# Altium PCB WS2812B_Bar.PcbDoc
Units mil, origin at the board's own origin, x right, y up, seen from the top; angles counter-clockwise.
Board outline 2559.06 x 511.81 mil, 2 copper layers (Top Layer, Bottom Layer); 32 components, 13 nets, 80 pads, 19 vias.
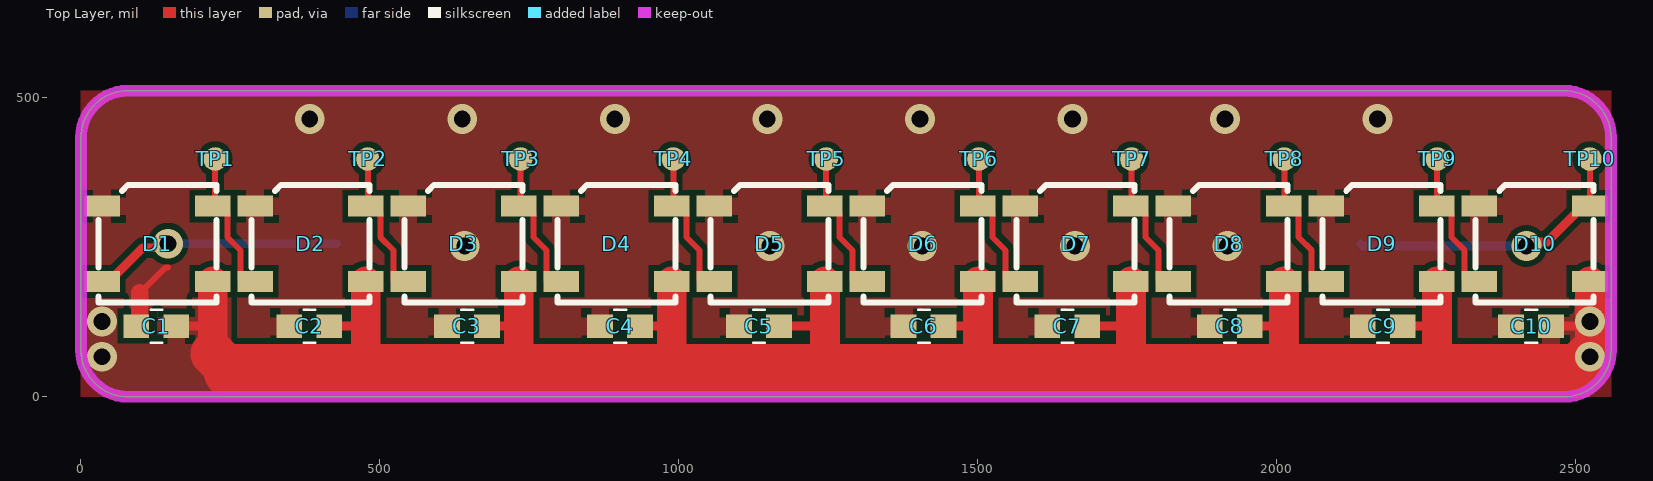
[diagram p0: Top Layer view]
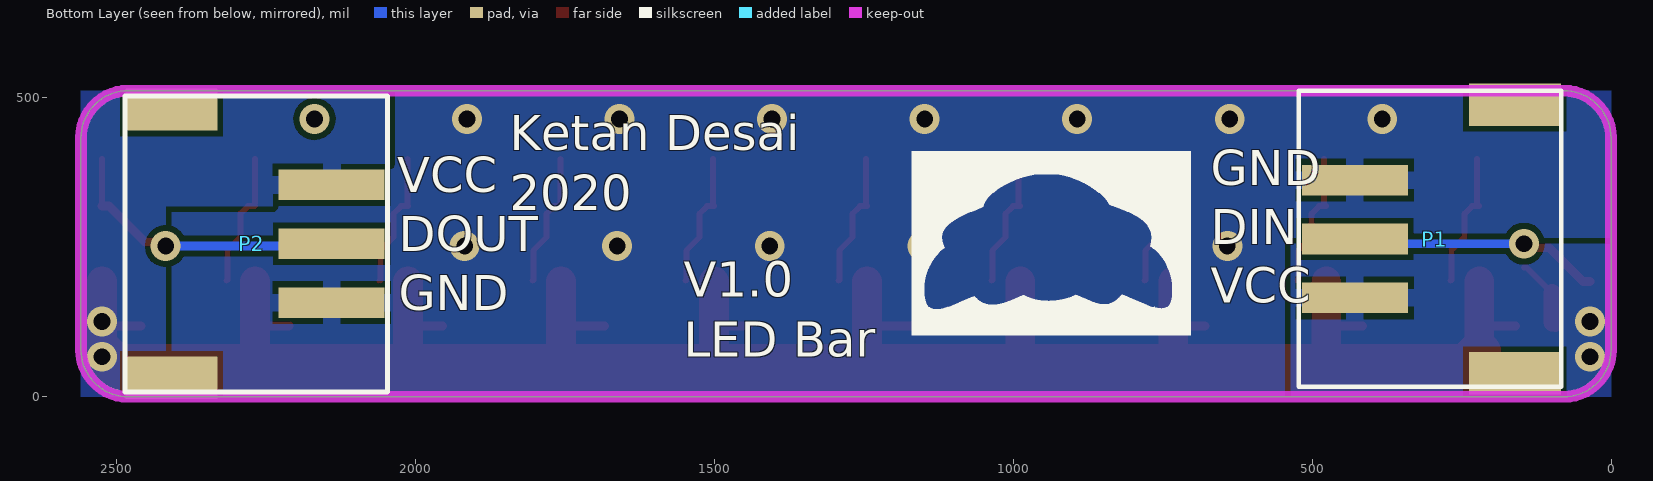
[diagram p1: Bottom Layer view, seen from below]
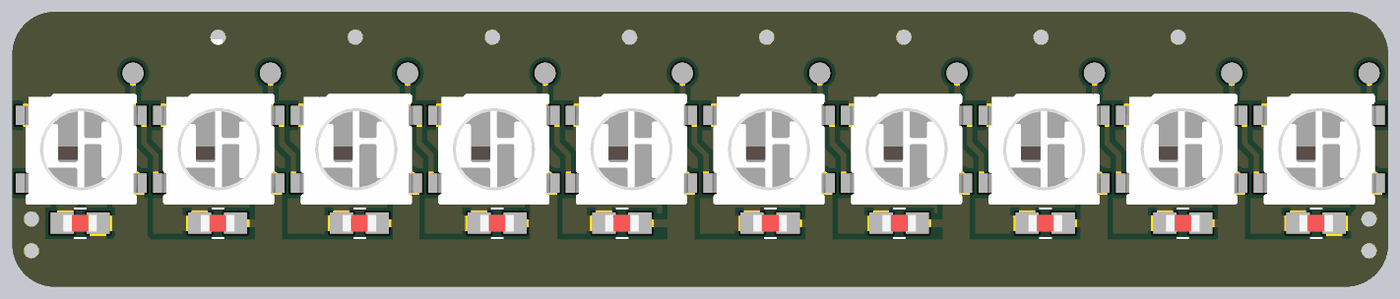
[diagram p2: 3D render of the assembled board from above, using the file's embedded part models]

## Layer stack, top to bottom
Top Solder: solder mask 0.4, Solder Resist, Dk 3.5
Top Layer: signal copper 1.4
Dielectric 1: dielectric 12.6, FR-4, Dk 4.8
Bottom Layer: signal copper 1.4
Bottom Solder: solder mask 0.4, Solder Resist, Dk 3.5

## Board outline
2559.06,433.07 ccw(c2480.32,433.07) 2480.32,511.81 78.74,511.81 ccw(c78.74,433.07) 0,433.07 0,78.74 ccw(c78.74,78.74) 78.74,0 2480.32,0 ccw(c2480.32,78.74) 2559.06,78.74

## Design rules (kind name [scope] priority, off if disabled: settings)
Clearance [All] p1: gap=10 ignorepadtopadclearanceinfootprint=FALSE except(0: Arc-Hole Track-Hole SMDPad-Hole THPad-Hole Via-Hole Fill-Hole Poly-Hole Region-Hole Text-Hole)
PolygonConnect PolygonConnect_4 [All vs IsNamedPolygon('NONET_L-01_P-001')] p1: thpad.connectstyle=Relief thpad.reliefconductorwidth=10 thpad.reliefentries=4 thpad.polygonreliefangle="90 Angle" thpad.airgapwidth=10 smdpad.connectstyle=Relief smdpad.reliefconductorwidth=30 smdpad.reliefentries=4 smdpad.polygonreliefangle="90 Angle" smdpad.airgapwidth=10 via.connectstyle=Direct via.reliefconductorwidth=10 via.reliefentries=4 via.polygonreliefangle="90 Angle" via.airgapwidth=10
PolygonConnect PolygonConnect_3 [All vs IsNamedPolygon('NONET_L-01_P-001')] p2: thpad.connectstyle=Relief thpad.reliefconductorwidth=10 thpad.reliefentries=4 thpad.polygonreliefangle="90 Angle" thpad.airgapwidth=10 smdpad.connectstyle=Relief smdpad.reliefconductorwidth=25 smdpad.reliefentries=4 smdpad.polygonreliefangle="90 Angle" smdpad.airgapwidth=10 via.connectstyle=Direct via.reliefconductorwidth=10 via.reliefentries=4 via.polygonreliefangle="90 Angle" via.airgapwidth=10
PolygonConnect PolygonConnect_2 [All vs IsNamedPolygon('NONET_L-01_P-001')] p3: thpad.connectstyle=Relief thpad.reliefconductorwidth=10 thpad.reliefentries=4 thpad.polygonreliefangle="90 Angle" thpad.airgapwidth=10 smdpad.connectstyle=Relief smdpad.reliefconductorwidth=10 smdpad.reliefentries=4 smdpad.polygonreliefangle="90 Angle" smdpad.airgapwidth=10 via.connectstyle=Direct via.reliefconductorwidth=10 via.reliefentries=4 via.polygonreliefangle="90 Angle" via.airgapwidth=10
PolygonConnect PolygonConnect_1 [All vs IsNamedPolygon('NONET_L-01_P-001')] p4: thpad.connectstyle=Relief thpad.reliefconductorwidth=10 thpad.reliefentries=4 thpad.polygonreliefangle="90 Angle" thpad.airgapwidth=10 smdpad.connectstyle=Relief smdpad.reliefconductorwidth=10 smdpad.reliefentries=4 smdpad.polygonreliefangle="90 Angle" smdpad.airgapwidth=10 via.connectstyle=Direct via.reliefconductorwidth=10 via.reliefentries=4 via.polygonreliefangle="90 Angle" via.airgapwidth=10
PolygonConnect [All] p5: connectstyle=Relief reliefconductorwidth=10 reliefentries=4 polygonreliefangle="90 Angle" airgapwidth=10
RoutingVias [All] p1: holewidth=28 width=50 viastyle="Through Hole" minholewidth=28 minwidth=50 maxholewidth=28 maxwidth=50
SolderMaskExpansion [All] p1: expansion=4 istentingtop=FALSE
Width [All] p1: maxlimit=90 minlimit=7 preferedwidth=10
30 further rules are at their usual default settings.

## Components (designator, comment, footprint, x,y, rotation, side; value= is the part's Value field where it differs from the comment)
C1 "C0603 100nF 25V X7R" C0603-IPC 125.98,118.11 r0 top value=100nF
C2 "C0603 100nF 25V X7R" C0603-IPC 381.89,118.11 r0 top value=100nF
C3 "C0603 100nF 25V X7R" C0603-IPC 645.67,118.11 r0 top value=100nF
C4 "C0603 100nF 25V X7R" C0603-IPC 901.57,118.11 r0 top value=100nF
C5 "C0603 100nF 25V X7R" C0603-IPC 1133.86,118.11 r0 top value=100nF
C6 "C0603 100nF 25V X7R" C0603-IPC 1409.45,118.11 r0 top value=100nF
C7 "C0603 100nF 25V X7R" C0603-IPC 1649.61,118.11 r0 top value=100nF
C8 "C0603 100nF 25V X7R" C0603-IPC 1921.26,118.11 r0 top value=100nF
C9 "C0603 100nF 25V X7R" C0603-IPC 2177.17,118.11 r0 top value=100nF
C10 "C0603 100nF 25V X7R" C0603-IPC 2425.2,118.11 r0 top value=100nF
D1 "WS2812B" WS2812B 127.95,255.91 r180 top
D2 "WS2812B" WS2812B 383.86,255.91 r180 top
D3 "WS2812B" WS2812B 639.76,255.91 r180 top
D4 "WS2812B" WS2812B 895.67,255.91 r180 top
D5 "WS2812B" WS2812B 1151.57,255.91 r180 top
D6 "WS2812B" WS2812B 1407.48,255.91 r180 top
D7 "WS2812B" WS2812B 1663.39,255.91 r180 top
D8 "WS2812B" WS2812B 1919.29,255.91 r180 top
D9 "WS2812B" WS2812B 2175.2,255.91 r180 top
D10 "WS2812B" WS2812B 2431.1,255.91 r180 top
P1 "XH-A" "XH Header 1x3 SMD 2.5MM HORIZONTAL" 294.76,263.84 r90 bottom
P2 "XH-A" "XH Header 1x3 SMD 2.5MM HORIZONTAL" 2273.62,255.91 r270 bottom
TP1 "Testpoint_SMT" TESTPOINT_SMT 255.91,366.14 r90 top
TP2 "Testpoint_SMT" TESTPOINT_SMT 511.37,366.14 r90 top
TP3 "Testpoint_SMT" TESTPOINT_SMT 766.84,366.14 r90 top
TP4 "Testpoint_SMT" TESTPOINT_SMT 1022.31,366.14 r90 top
TP5 "Testpoint_SMT" TESTPOINT_SMT 1277.78,366.14 r90 top
TP6 "Testpoint_SMT" TESTPOINT_SMT 1533.25,366.14 r90 top
TP7 "Testpoint_SMT" TESTPOINT_SMT 1788.71,366.14 r90 top
TP8 "Testpoint_SMT" TESTPOINT_SMT 2044.18,366.14 r90 top
TP9 "Testpoint_SMT" TESTPOINT_SMT 2299.65,366.14 r90 top
TP10 "Testpoint_SMT" TESTPOINT_SMT 2555.12,366.14 r90 top

## Footprints (in the part's own frame and the unit in brackets; to place one, negate y for a bottom-side part, rotate by r counter-clockwise, add the part's x,y. Pads: shape width x height; smd on the part's side, far side on the other; paste and mask are expansions set on the pad)
C0603-IPC [mm]
  rect 1.1x1 smd: 1(-0.85,0) 2(0.85,0)
  silkscreen extent -0.24,-0.7 0.26,0.7, body extent -0.8,-0.4 0.8,0.4, height 0.3
TESTPOINT_SMT [mm]
  round 1 smd: 1(0.8,0.8)
WS2812B [mm] "WS2812 Individually Addressable LED"
  rect 1.5x0.9 smd: 1(-2.35,1.6) 2(-2.35,-1.6) 3(2.35,-1.6) 4(2.35,1.6)
  silkscreen extent -2.5,-2.5 2.5,2.5, body extent -2.67,-2.48 2.68,2.47, height 1.71
"XH Header 1x3 SMD 2.5MM HORIZONTAL" [mm] "S3B-XH-A(LF)(SN)"
  rect 1.3x4.5 smd: 1(-2.5,3.4) 2(0,3.4) 3(2.5,3.4)
  rect 1.8x3.9 smd: ""(-5.7,-3.4) ""(5.7,-3.4)
  silkscreen extent -6.27,-5.37 6.3,5.77, body extent -6.25,-5.35 6.25,4.65, height 6

## Part data
C1 C2 C3 C4 C5 C6 C7 C8 C9 C10: "Chip Capacitor, 0603, 100nF, 25V, X7R", Max. Voltage=25V, Supplier Part Number 1=490-1524-1-ND, EIA Code=X7R, Supplier 1=Digi-Key
D1 D2 D3 D4 D5 D6 D7 D8 D9 D10: "Addressable Lighting - Discrete Serial Red, Green, Blue (RGB) 5.00mm L x 5.00mm WS2812B", Supplier Part Number 1=1528-1104-ND, Supplier 1=Digi-Key, Supplier 2=Mouser, Supplier 3=LCSC, Supplier Part Number 2=485-1655, Supplier Part Number 3=C114586
P1 P2: library part "JST XH 1x3", "XH Header Male Pin 0.098\"(2.50mm) 3 Wire To Board / Wire To Wire Connector", Supplier Part Number 1=455-2248-ND, LatestRevisionDate=17-Jul-2002, LatestRevisionNote="Re-released for DXP Platform.", Publisher="Altium Limited", Supplier 1=Digi-Key, Supplier 3=LCSC, Supplier Part Number 3=C144394
TP1 TP2 TP3 TP4 TP5 TP6 TP7 TP8 TP9 TP10: "SMT Test Point"

## Via types
v1: diameter 50, hole 28, Top Layer to Bottom Layer, tented both sides, 19 vias

## Nets (pads, with @x,y where several pads share a name; then routed paths per layer and width w, separated by ;. In a path a pad name is that pad's centre, name@x,y a point inside that pad or via, vN(x,y) a via of type N, cw(c..) or ccw(c..) an arc to the next point about the centre after c; other vN are vias at no path point)
GND: C1.1 C2.1 C3.1 C4.1 C5.1 C6.1 C7.1 C8.1 C9.1 C10.1 D1.3 D2.3 D3.3 D4.3 D5.3 D6.3 D7.3 D8.3 D9.3 D10.3 P1.3 P2.3 | length 122.5
  Top Layer w10: 98.43,173.23 141.1,215.91 145.67,215.91
  Top Layer w20: C1.1 C1.1@98.43,124.02
  Top Layer w30: C1.1@98.43,124.02 98.43,173.23
  other v1: 641.73,251.97 1151.97,251.97 1407.09,251.97 1662.2,251.97 1917.32,251.97 382.68,464.57 637.8,464.57 892.91,464.57 1148.03,464.57 1403.15,464.57 1658.27,464.57 1913.39,464.57 2168.5,464.57
NetD1_2: D1.2 D2.4 TP1.1 | length 231.9
  Top Layer w10: TP1.1 224.41,322.83 D1.2 232.28,318.9 245,306.18 245,266.81 266.81,245 266.81,195.49 D2.4@268.23,194.07
NetD1_4: D1.4 P1.2 | length 419.3
  Top Layer w15: D1.4 47.24,192.91 103.54,249.21 138.97,249.21 v1(145.67,255.91)
  Bottom Layer w15: v1(145.67,255.91) P1.2@428.62,255.91
NetD2_2: D2.2 D3.4 TP2.1 | length 226.3
  Top Layer w10: D2.2 488.19,318.9 500.91,306.18 500.91,266.81 522.72,245 522.72,195.49 D3.4@524.13,194.07 ; D2.2@479.88,322.83 TP2.1
NetD3_2: D3.2 D4.4 TP3.1 | length 226.3
  Top Layer w10: D3.2 744.09,318.9 756.81,306.18 756.81,266.81 778.62,245 778.62,195.49 D4.4@780.04,194.07 ; D3.2@735.35,322.83 TP3.1
NetD4_2: D4.2 D5.4 TP4.1 | length 226.3
  Top Layer w10: D4.2 1000,318.9 1012.72,306.18 1012.72,266.81 1034.53,245 1034.53,195.49 D5.4@1035.94,194.07 ; D4.2@990.81,322.83 TP4.1
NetD5_2: D5.2 D6.4 TP5.1 | length 226.3
  Top Layer w10: D5.2 1255.91,318.9 1268.62,306.18 1268.62,266.81 1290.43,245 1290.43,195.49 D6.4@1291.85,194.07 ; D5.2@1246.28,322.83 TP5.1
NetD6_2: D6.2 D7.4 TP6.1 | length 226.3
  Top Layer w10: D6.2 1511.81,318.9 1524.53,306.18 1524.53,266.81 1546.34,245 1546.34,195.49 D7.4@1547.75,194.07 ; D6.2@1501.75,322.83 TP6.1
NetD7_2: D7.2 D8.4 TP7.1 | length 226.3
  Top Layer w10: D7.2 1767.72,318.9 1780.43,306.18 1780.43,266.81 1802.24,245 1802.24,195.49 D8.4@1803.66,194.07 ; D7.2@1757.22,322.83 TP7.1
NetD8_2: D8.2 D9.4 TP8.1 | length 226.3
  Top Layer w10: D8.2 2023.62,318.9 2036.34,306.18 2036.34,266.81 2058.15,245 2058.15,195.49 D9.4@2059.56,194.07 ; D8.2@2012.69,322.83 TP8.1
NetD9_2: D9.2 D10.4 TP9.1 | length 226.3
  Top Layer w10: D9.2 2279.53,318.9 2292.24,306.18 2292.24,266.81 2314.05,245 2314.05,195.49 D10.4@2315.47,194.07 ; D9.2@2268.15,322.83 TP9.1
NetD10_2: D10.2 P2.2 TP10.1 | length 488
  Top Layer w10: D10.2@2523.62,322.83 TP10.1
  Top Layer w15: v1(2417.32,251.97) 2424.02,258.67 2451.58,258.67 2511.81,318.9 D10.2
  Bottom Layer w15: P2.2 2143.7,251.97 v1(2417.32,251.97)
VCC: C1.2 C2.2 C3.2 C4.2 C5.2 C6.2 C7.2 C8.2 C9.2 C10.2 D1.1 D2.1 D3.1 D4.1 D5.1 D6.1 D7.1 D8.1 D9.1 D10.1 P1.1 P2.1 | length 4359.7
  Top Layer w15: C1.2 220.47,118.11 ; C2.2 474.41,118.11 476.38,120.08 ; C3.2 730.31,118.11 732.28,120.08 ; C4.2 986.22,118.11 988.19,120.08 ; C5.2 1242.13,118.11 1244.09,120.08 ; C6.2 1498.03,118.11 1500,120.08 ; C7.2 1753.94,118.11 1755.91,120.08 ; C8.2 2009.84,118.11 2011.81,120.08 ; C9.2 2265.75,118.11 2267.72,120.08 ; C10.2 v1@2523.62,118.11
  Top Layer w50: 220.47,72.6 220.47,118.11 D1.1 ; 472.44,43.31 476.38,47.24 476.38,120.08 D2.1 ; 732.28,47.24 732.28,120.08 D3.1 ; 988.19,47.24 988.19,120.08 D4.1 ; 1244.09,47.24 1244.09,120.08 D5.1 ; 1500,47.24 1500,120.08 D6.1 ; 1755.91,47.24 1755.91,120.08 D7.1 ; 2011.81,47.24 2011.81,120.08 D8.1 ; 2267.72,47.24 2267.72,120.08 D9.1 ; v1@2523.62,72.6 2523.62,118.11 D10.1
  Top Layer w75: 220.47,72.6 249.76,43.31 ; 2494.33,43.31 v1@2523.62,72.6
  Top Layer w90: 249.76,43.31 472.44,43.31 732.28,43.31 988.19,43.31 1244.09,43.31 1500,43.31 1755.91,43.31 2011.81,43.31 2267.72,43.31 2494.33,43.31
  other v1: 35.43,66.93 2523.62,66.93 35.43,125.98 2523.62,125.98
pads on no net: P1. P2.

## Polygon pours and split planes (outlines as drawn)
VCC on Top Layer "NONET_L-01_P-001" (solid, remove dead copper, pour order 0): 70.87,165.17 70.87,88.43 127.8,88.43 127.45,145.01 186.17,146.8 186.17,220.63 251.52,220.63 251.52,0 0,0 0,164.73
VCC on Top Layer "NONET_L-01_P-001" (solid, remove dead copper, pour order 3): 2434.97,221.4 2434.97,1.9 2433.07,0 2559.06,0 2559.06,220.63
GND on Top Layer "NONET_L-01_P-001" (solid, remove dead copper, pour order 2): 0,0 0,511.81 2559.06,511.81 2559.06,0
VCC on Bottom Layer "NONET_L-01_P-001" (solid, pour order 4): 2417.32,0 2559.06,0 2559.06,511.81 2043.31,511.81 2043.31,320.87 2041.34,318.9 2417.32,318.9
VCC on Bottom Layer "NONET_L-01_P-001" (solid, pour order 1): 535.43,255.91 0,255.91 0,0 535.43,0
GND on Bottom Layer "NONET_L-01_P-001" (solid, remove dead copper, pour order 5): 0,0 0,511.81 2559.06,511.81 2559.06,0

## Keep-outs
Keep-Out Layer:
  the board outline again, w19.68

## Silkscreen, mask and mechanical layers (free items; w line width, h text height)
Bottom Overlay:
  region: 759 vertices and 1 holes, not listed, extent 702.81,102.9 1169.57,410.81
  text "GND" at 669.29,334.65 h100
  text "VCC" at 2029.64,322.64 h100
  text "Ketan Desai / 2020" at 1841.47,293.08 h100
  text "DIN" at 669.29,236.22 h100
  text "DOUT" at 2027.42,224.21 h100
  text "VCC" at 669.29,137.8 h100
  text "GND" at 2027.42,125.79 h100
  text "V1.0 / LED Bar" at 1551.18,47.83 h100
Bottom Solder:
  drawing of 5 lines, arcs and shapes, not listed